# Altium PCB 红黑红黑的小黄鸡二队区赛2.0.PcbDoc
Units mil, origin at the board's own origin, x right, y up, seen from the top; angles counter-clockwise.
Board outline 4400.1 x 3055.69 mil, 2 copper layers (Top Layer, Bottom Layer); 73 components, 67 nets, 341 pads, 184 vias.
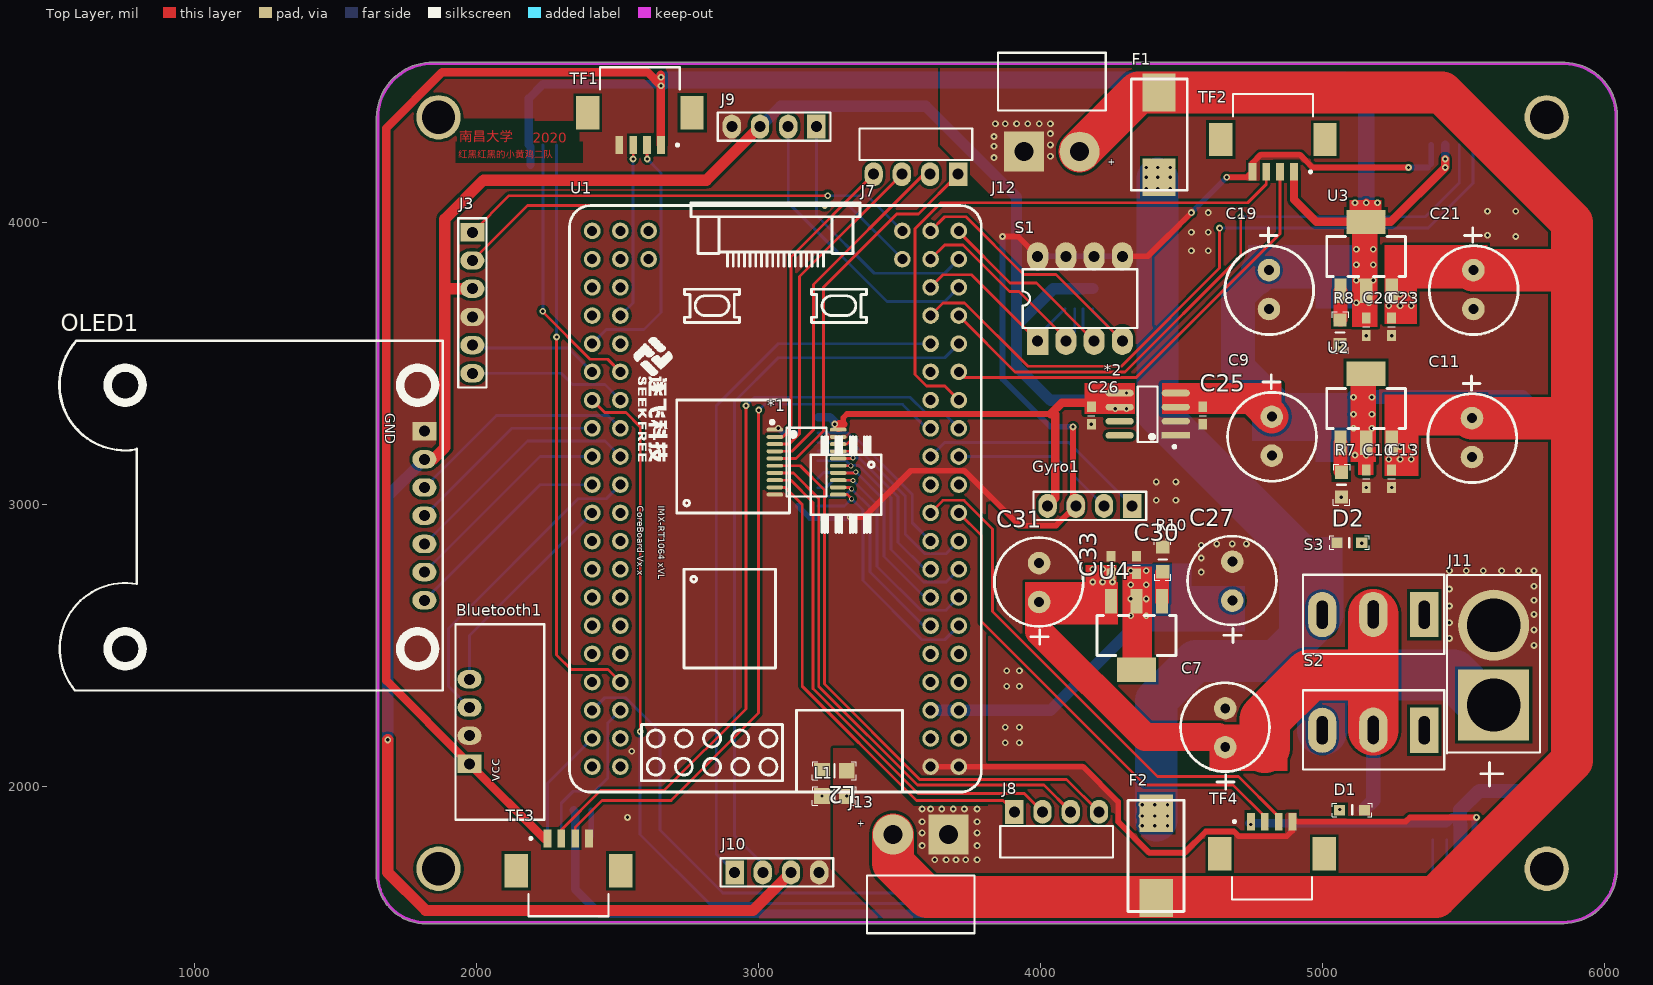
[diagram p0: Top Layer view]
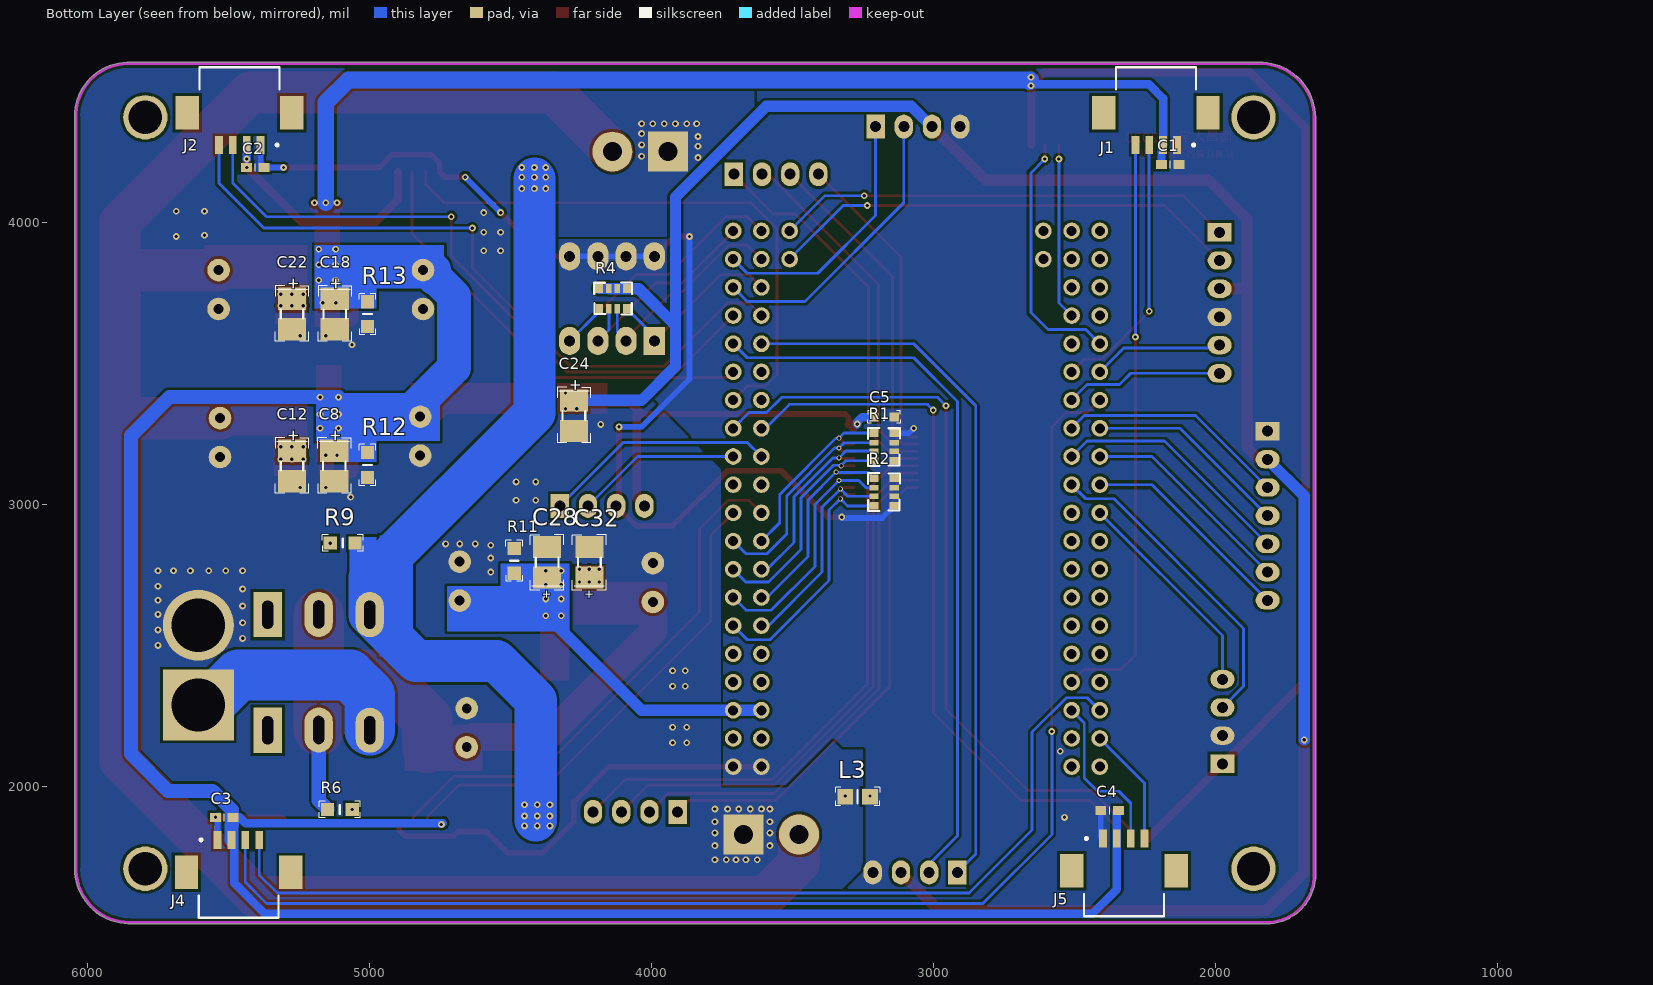
[diagram p1: Bottom Layer view, seen from below]
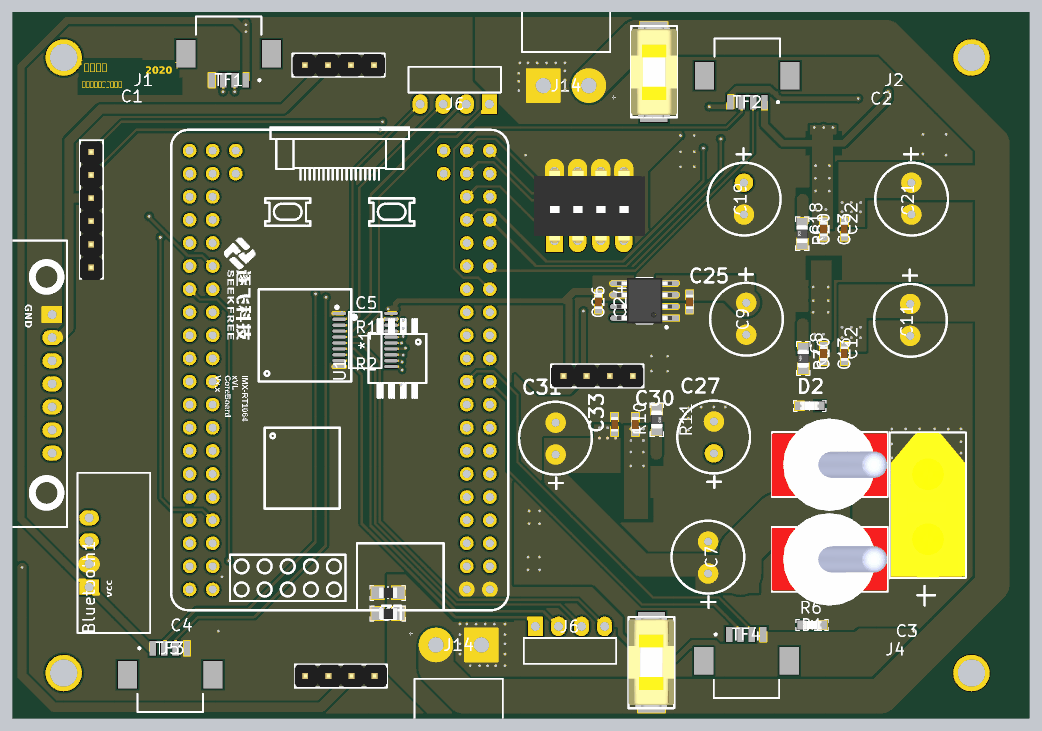
[diagram p2: 3D render of the assembled board from above, using the file's embedded part models]
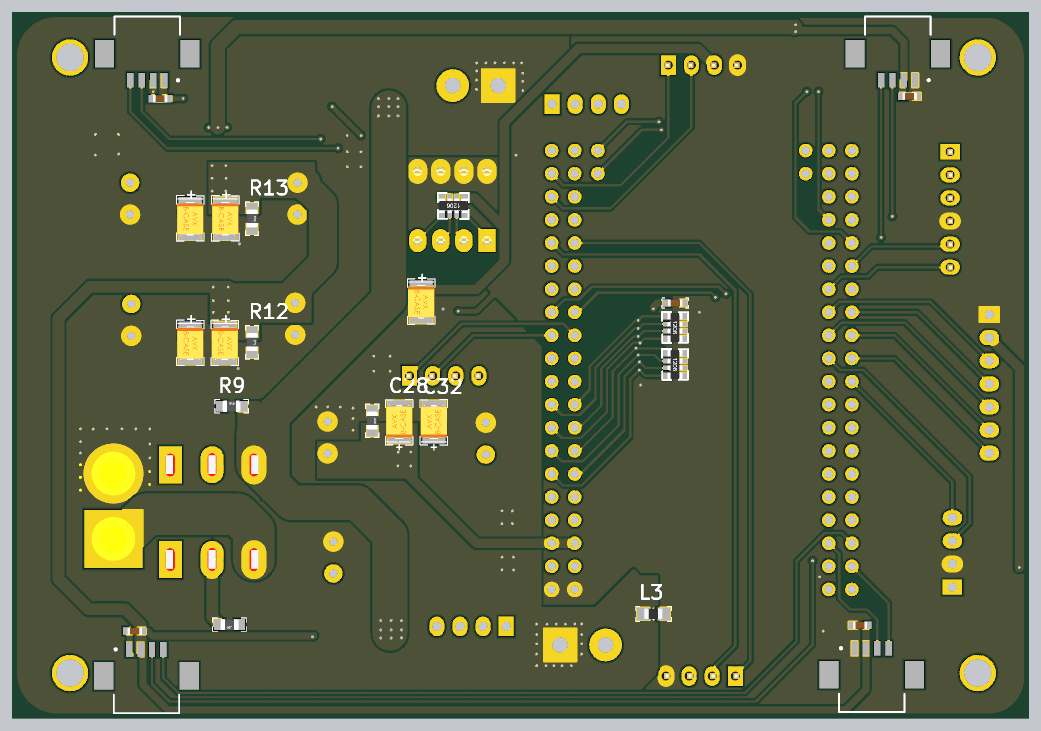
[diagram p3: 3D render of the assembled board from below, using the file's embedded part models]

## Layer stack, top to bottom
Top Solder: solder mask 0.4, Solder Resist, Dk 3.5
Top Layer: signal copper 1.4
Dielectric 1: dielectric 12.6, FR-4, Dk 4.8
Bottom Layer: signal copper 1.4
Bottom Solder: solder mask 0.4, Solder Resist, Dk 3.5

## Board outline
1645,1672.56 ccw(c1820,1688) 1835.22,1512.98 5850,1512.98 ccw(c5850,1518) 5852.5,1513.65 ccw(c5855,1518) 5855.13,1512.99 ccw(c5850,1708) 6045.08,1708 ccw(c5850,1708) 6045.02,1713.07 ccw(c5850,1708) 6045.01,1713.13 6045.02,1713 6045.02,4372.93 ccw(c5855,4378) 6045.08,4378 ccw(c5855,4378) 5860.14,4568.01 ccw(c5860,4563) 5860,4568.01 5860,4568.02 1845.03,4568.02 cw(c1842.5,4370.5) 1845.07,4568.01 1845.03,4568.02 ccw(c1842.5,4370.5) 1644.99,4373.07 ccw(c1650,4373) 1644.98,4373 1644.98,1673 ccw(c1650,1673)

## Design rules (kind name [scope] priority, off if disabled: settings)
Clearance [All] p1: gap=10
PlaneConnect [All] p1: planeconnectstyle=Direct reliefexpansion=20 reliefentries=4 reliefconductorwidth=10 reliefairgap=10
PolygonConnect [All] p1: connectstyle=Direct reliefconductorwidth=10 reliefentries=4 polygonreliefangle="90 Angle" airgapwidth=10
RoutingVias [All] p1: holewidth=28 width=50 viastyle="Through Hole" minholewidth=28 minwidth=50 maxholewidth=28 maxwidth=50
SolderMaskExpansion [All] p1: expansion=4
UnpouredPolygon [All] p1: allowunpoured=FALSE
Width [All] p1: maxlimit=200 minlimit=10 preferedwidth=10
28 further rules are at their usual default settings.

## Components (designator, comment, footprint, x,y, rotation, side; value= is the part's Value field where it differs from the comment)
*1 "74LV245a" TSSOP-20 3170,3150 r270 top
*2 "TPS76833" SOIC_8 4380,3320 r0 top
Bluetooth1 "Bluetooth4-pin" Bluetooth-4 1975,2080 r90 top
C1 "0603" CAP-0603#1 2160,4205 r180 bottom
C2 "0603" CAP-0603#1 5405,4195 r180 bottom
C3 "0603" CAP-0603#1 5515,1890 r0 bottom
C4 "0603" CAP-0603#1 2375,1915 r0 bottom
C5 "CAP-0603(1608)" CAP-0603#2 3175,3310 r0 bottom
C7 "CAP-DIP-8*14" CAP-DIP-8X14 4670,2210 r90 top
C8 "" CAP-3528 5125,3136.02 r270 bottom
C9 "" CAP-DIP-8X14 4805,3240 r270 top
C10 "" CAP-0603#1 5155,3091.02 r90 top
C11 "" CAP-DIP-8X14 5515,3235 r270 top
C12 "" CAP-3528 5275,3136.02 r270 bottom
C13 "" CAP-0603#1 5245,3091.02 r90 top
C18 "" CAP-3528 5123,3675 r270 bottom
C19 "" CAP-DIP-8X14 4795,3760 r270 top
C20 "" CAP-0603#1 5155,3630 r90 top
C21 "" CAP-DIP-8X14 5520,3760 r270 top
C22 "" CAP-3528 5275,3675 r270 bottom
C23 "" CAP-0603#1 5245,3630 r90 top
C24 "CAP-TAN-3528(B)" CAP-3528 4275,3315 r270 bottom
C25 "CAP-0603(1608)" CAP-0603#1 4575,3315 r90 top
C26 "CAP-0603(1608)" CAP-0603#1 4180,3315 r270 top
C27 "" CAP-DIP-8X14 4695,2730 r90 top
C28 "" CAP-3528 4370,2795 r90 bottom
C30 "" CAP-0603#1 4340,2785 r270 top
C31 "" CAP-DIP-8X14 4010,2725 r90 top
C32 "" CAP-3528 4220,2795 r90 bottom
C33 "" CAP-0603#1 4250,2785 r270 top
D1 "LED-0805" LED-0805 5105,1916 r0 top
D2 "LED-0805" LED-0805 5095,2865 r180 top
F1 "FUSE-1808-Base" Fuse1808_Base 4420,4160 r90 top
F2 "FUSE-1808-Base" Fuse1808_Base 4410,1905 r270 top
Gyro1 "Header1x4" HEADER1X4 4175,2990 r180 top
J1 "XH-1.25-4P" XH-1.25-4 2210,4275 r0 bottom locked
J2 "XH-1.25-4P" XH-1.25-4 5460,4275 r0 bottom
J3 "Header1x6" HEADER1X6 1985,3715 r270 top
J4 "XH-1.25-4P" XH-1.25-4 5465,1810 r180 bottom
J5 "XH-1.25-4P" XH-1.25-4 2325,1815 r180 bottom
J7 "Header1x4弯座" "HEADER1X4 - BENT" 3560,4172 r180 top locked (schematic designator J6)
J8 "Header1x4弯座" "HEADER1X4 - BENT" 4055,1909 r0 top locked (schematic designator J6)
J9 "Header1x4" HEADER1X4 3055,4335 r180 top
J10 "Header1x4" HEADER1X4 3065,1700 r0 top
J11 "Header-XT60-FEMALE" HEADER-XT60-FEMALE 5610,2290 r90 top
J12 "XT30-F" XT30PW-F 4040,4251.35 r0 top locked (schematic designator J14)
J13 "XT30-F" XT30PW-F 3575,1829.65 r180 top locked (schematic designator J14)
L1 "磁珠0805" bead-0805 3270,1965 r180 top
L2 "磁珠0805" bead-0805 3270,2055 r180 top
L3 "磁珠0805" bead-0805 3270,1965 r180 bottom
OLED1 "OLED" OLED 1815,3260 r270 top
R1 "RES-0603-PACK" "RES-0603 - PACK" 3175,3205 r180 bottom
R2 "RES-0603-PACK" "RES-0603 - PACK" 3175,3045 r180 bottom
R4 "RES-0603-PACK" "RES-0603 - PACK" 4135,3730 r270 bottom
R6 "RES-0805" RES-0805 5100,1991 r0 bottom
R7 "" RES-0805 5140,3065 r90 top
R8 "" RES-0805 5135,3605 r90 top
R9 "RES-0805" RES-0805 5100,2790 r180 bottom
R10 "" RES-0805 4360,2810 r270 top
R11 "RES-0805" RES-0805 4560,2805 r270 bottom
R12 "RES-0805" RES-0805 5080,3145 r270 bottom
R13 "RES-0805" RES-0805 5080,3680 r270 bottom
S1 "SW-4" DIP-8 4155,3735 r90 top
S2 "SW" SW-B 5180,2200 r180 top
S3 "SW-B" SW-B 5180,2610 r180 top
TF1 "XH-1.25-4P" XH-1.25-4 2580,4275 r180 top
TF2 "XH-1.25-4P" XH-1.25-4 4825,4180 r180 top
TF3 "XH-1.25-4P" XH-1.25-4 2325,1815 r0 top
TF4 "XH-1.25-4P" XH-1.25-4 4820,1875 r0 top
U1 "MIMXRT1064xVL_CoreBoard" MIMXRT1064xVL_CoreBoard 3060,3020 r90 top locked
U2 "LT3080EST#TRPBF" SOT-223-3_L6.5-W3.4-P2.30-LS7.0-BR 53510,-44993.98 r270 top
U3 "LT3080EST#TRPBF" SOT-223-3_L6.5-W3.4-P2.30-LS7.0-BR 53510,-44455 r270 top
U4 "LT3080EST#TRPBF" SOT-223-3_L6.5-W3.4-P2.30-LS7.0-BR -44015,50870 r90 top

## Footprints (in the part's own frame and the unit in brackets; to place one, negate y for a bottom-side part, rotate by r counter-clockwise, add the part's x,y. Pads: shape width x height; smd on the part's side, far side on the other; paste and mask are expansions set on the pad)
bead-0805 [mil]
  rect 55.12x55.12 smd: 1(-43,-1) 2(45,-1)
  silkscreen extent -76,-33 79,32, body extent -39,-24 39,23, height 37
Bluetooth-4 [mil]
  rect 65x85 hole 39: 1(0,0)
  oval 65x85 hole 39: 2(100,0) 3(200,0) 4(300,0)
  silkscreen extent -198,-265 495,50, body extent -61,-49 359,49, height 344
CAP-0603#1 [mm]
  rect 0.96x0.8 smd: 1(-0.79,0) 2(0.79,0)
  silkscreen extent 0,-0.33 0,0.33, body extent -0.8,-0.41 0.8,0.41, height 0.8
CAP-0603#2 [mm]
  rect 0.826x0.8 smd: 1(-0.914,0) 2(0.914,0)
  silkscreen extent -1.47,-0.56 1.47,0.56, body extent -1.05,-0.39 1.05,0.41, height 0.8
CAP-3528 [mm]
  rect 2x2.54 smd: 1(-1.374,0) 2(1.374,0)
  silkscreen extent -2.54,-1.5 2.47,1.52, body extent -1.85,-1.47 1.85,1.46, height 2.03
CAP-DIP-8X14 [mil]
  round 80 hole 35.43: 1(-71,15) 2(67,15)
  silkscreen extent -220,-141 157,173, body extent -162,-144 160,178, height 567
DIP-8 [mil]
  rect 100x75 hole 39: 1(-155,165)
  oval 100x75 hole 39: 2(-155,65) 3(-155,-35) 4(-155,-135) 5(145,-135) 6(145,-35) 7(145,65) 8(145,165)
  silkscreen extent -109,-188 99,218, body extent -166,-226 158,254, height 204
Fuse1808_Base [mm]
  rect 3.4x3 smd: 1(0,0) 2(7.645,0)
  silkscreen extent -1.17,-2.54 8.86,2.5, body extent -1.1,-2.54 8.72,2.49, height 3.81
HEADER1X4 [mil]
  rect 65x85 hole 39: 1(-150,-5)
  oval 65x85 hole 39: 2(-50,-5) 3(50,-5) 4(150,-5)
  silkscreen extent -200,-55 200,45, body extent -200,-53 200,45, height 323
"HEADER1X4 - BENT" [mil]
  rect 65x85 hole 39: 1(-148,1)
  oval 65x85 hole 39: 2(-48,1) 3(52,1) 4(152,1)
  silkscreen extent -198,-161 202,-49, body extent -199,-394 201,14, height 121
HEADER1X6 [mil]
  rect 65x85 hole 39: 1(-250,0)
  oval 65x85 hole 39: 2(-150,0) 3(-50,0) 4(50,0) 5(150,0) 6(250,0)
  silkscreen extent -300,-50 300,50, body extent -295,-50 305,48, height 323
HEADER-XT60-FEMALE [mm]
  rect 6.4x6.4 hole 4.8: 1(-0.025,0.076)
  round 6.4 hole 4.8: 2(7.163,0.076)
  silkscreen extent -7.34,-4.09 11.68,4.29, body extent -4.27,-4 11.63,4.15, height 18
LED-0805 [mil]
  rect 39.24x37.24 smd: 1(-44.11,0) 2(44.11,0)
  silkscreen extent -70,-24 70,24, body extent -40,-18 42,18, height 33
MIMXRT1064xVL_CoreBoard [mm] "逐飞科技i.MX RT1064核心板整体封装，可?"
  round 1.5 hole 0.9: 1(-24.13,-16.51) 2(-24.13,-13.97) 3(-21.59,-16.51) 4(-21.59,-13.97) 5(-19.05,-16.51) 6(-19.05,-13.97) 7(-16.51,-16.51) 8(-16.51,-13.97) 9(-13.97,-16.51) 10(-13.97,-13.97) 11(-11.43,-16.51) 12(-11.43,-13.97) 13(-8.89,-16.51) 14(-8.89,-13.97) 15(-6.35,-16.51) 16(-6.35,-13.97) 17(-3.81,-16.51) 18(-3.81,-13.97) 19(-1.27,-16.51) 20(-1.27,-13.97) 21(1.27,-16.51) 22(1.27,-13.97) 23(3.81,-16.51) 24(3.81,-13.97) 25(6.35,-16.51) 26(6.35,-13.97) 27(8.89,-16.51) 28(8.89,-13.97) 29(11.43,-16.51) 30(11.43,-13.97) 31(13.97,-16.51) 32(13.97,-13.97) 33(16.51,-16.51) 34(16.51,-13.97) 35(19.05,-16.51) 36(19.05,-13.97) 37(21.59,-16.51) 38(21.59,-13.97) 39(24.13,-16.51) 40(24.13,-13.97) 41(21.59,-11.43) 42(24.13,-11.43) 43(24.13,11.43) 44(21.59,11.43) 45(24.13,13.97) 46(24.13,16.51) 47(21.59,13.97) 48(21.59,16.51) 49(19.05,13.97) 50(19.05,16.51) 51(16.51,13.97) 52(16.51,16.51) 53(13.97,13.97) 54(13.97,16.51) 55(11.43,13.97) 56(11.43,16.51) 57(8.89,13.97) 58(8.89,16.51) 59(6.35,13.97) 60(6.35,16.51) 61(3.81,13.97) 62(3.81,16.51) 63(1.27,13.97) 64(1.27,16.51) 65(-1.27,13.97) 66(-1.27,16.51) 67(-3.81,13.97) 68(-3.81,16.51) 69(-6.35,13.97) 70(-6.35,16.51) 71(-8.89,13.97) 72(-8.89,16.51) 73(-11.43,13.97) 74(-11.43,16.51) 75(-13.97,13.97) 76(-13.97,16.51) 77(-16.51,13.97) 78(-16.51,16.51) 79(-19.05,13.97) 80(-19.05,16.51) 81(-21.59,13.97) 82(-21.59,16.51) 83(-24.13,13.97) 84(-24.13,16.51)
  silkscreen extent -26.42,-18.54 26.67,18.54
OLED [mil]
  rect 65x85 hole 39: 1(0,0)
  oval 65x85 hole 39: 2(100,0) 3(200,0) 4(300,0) 5(400,0) 6(500,0) 7(600,0)
  silkscreen extent -320,-1295 920,65, body extent -60,-50 660,48, height 344
"RES-0603 - PACK" [mil]
  rect 32.5x27.56 smd: 1(-36,48) 4(-36,-50) 5(36.01,-50) 8(36,48)
  rect 32.5x19.68 smd: 2(-36,14) 3(-36,-16) 6(36.01,-16) 7(36.01,14)
  silkscreen extent -57,-68 56,66, body extent -41,-64 41,62
RES-0805 [mil]
  rect 46.85x47.24 smd: 1(-39,73) 2(49,73)
  silkscreen extent -68,44 78,102, body extent -35,48 43,98, height 31
SOIC_8 [mm]
  rect 2.54x0.6 smd: 1(2.527,-1.905)
  oval 2.54x0.6 smd: 2(2.527,-0.635) 3(2.527,0.635) 4(2.527,1.905) 5(-2.527,1.905) 6(-2.527,0.635) 7(-2.527,-0.635) 8(-2.527,-1.905)
  silkscreen extent -0.89,-3.05 2.54,2.5, body extent -3.02,-2.51 3.02,2.51, height 1.6
SOT-223-3_L6.5-W3.4-P2.30-LS7.0-BR [mm]
  rect 2.2x1.1 smd: 1(-1224.602,-1230.523) 2(-1224.602,-1228.223) 3(-1224.602,-1225.923)
  rect 2.2x3.5 smd: 4(-1230.8,-1228.223)
  silkscreen extent -1229.5,-1231.77 -1225.9,-1224.67
SW-B [mil]
  rect 100x160 hole 40 slot 100 at 90 deg: 1(-181,1)
  oval 100x160 hole 40 slot 100 at 90 deg: 2(0,0) 3(181,1)
  silkscreen extent -252,-141 249,140, body extent -251,-200 250,200, height 1120
TSSOP-20 [mm]
  oval 0.35x1.5 smd: 1(-2.925,-2.85) 2(-2.275,-2.85) 3(-1.625,-2.85) 4(-0.975,-2.85) 5(-0.325,-2.85) 6(0.325,-2.85) 7(0.975,-2.85) 8(1.625,-2.85) 9(2.275,-2.85) 10(2.925,-2.85) 11(2.925,2.85) 12(2.275,2.85) 13(1.625,2.85) 14(0.975,2.85) 15(0.325,2.85) 16(-0.325,2.85) 17(-0.975,2.85) 18(-1.625,2.85) 19(-2.275,2.85) 20(-2.925,2.85)
  silkscreen extent -3.75,-3.25 3.1,1.8
XH-1.25-4 [mm]
  rect 2.1x3 smd: 0(-4.675,-2.9) 0(4.725,-2.9)
  rect 0.7x1.6 smd: 1(-1.875,0) 2(-0.625,0) 3(0.625,0) 4(1.875,0)
  silkscreen extent -3.57,-7 3.63,0.11
XT30PW-F [mm]
  rect 3.6x3.6 hole 1.7: 1(-2.5,0)
  round 3.6 hole 1.7: 2(2.5,0)
  silkscreen extent -4.85,3.71 4.85,8.9

## Part data
*2: library part TPS768xx
C1 C2 C3 C4 C10 C13 C20 C23 C30 C33: library part CAP-0603(1608)
C7: "100UF"
C8 C12 C18 C22 C28 C32: library part CAP-TAN-3528(B), "0.15~150UF"
C9 C11 C19 C21 C27 C31: library part CAP-DIP-8*14, "100UF"
C24: "0.15~150UF"
F1 F2: "保险丝"
J7 J8: library part Header1x4
J11: "航模接头"
J12 J13: "Ir=15A, Imax=30A, Vr=500V, Rc=0.8mΩ, -20°C-120°C, 1000Times"
L1 L2 L3: library part 磁珠
R7 R8 R10: library part RES-0805
U1: "逐飞科技i.MX RT1064核心板整体原理，可直接使用"

## Free pads (board coordinates)
  round 157.48 hole 118.11: 0(1865,1708) 0(1865,4373) 0(5795,1708) 0(5795,4373)

## Via types
v1: diameter 24, hole 12, Top Layer to Bottom Layer, tented both sides, 176 vias
v2: diameter 18, hole 12, Top Layer to Bottom Layer, tented both sides, 8 vias

## Nets (pads, with @x,y where several pads share a name; then routed paths per layer and width w, separated by ;. In a path a pad name is that pad's centre, name@x,y a point inside that pad or via, vN(x,y) a via of type N, cw(c..) or ccw(c..) an arc to the next point about the centre after c; other vN are vias at no path point)
3V3: *1.20 *2.5 *2.6 C5.2 C24.1 C26.1 Gyro1.4 J3.3 J9.3 J10.3 OLED1.2 R4.1 R4.2 R4.3 R4.4 | length 9153.8
  Top Layer w20: 3300,3285 3300,3307 3313.47,3320.47 4035.47,3320.47 4052.03,3320.47 4052.5,3320
  Top Layer w30: *1.20@3282.2,3271.46 *1.20@3286.46,3271.46 ; 3286.46,3285 3300,3285 ; Gyro1.4 4052.5,3022.5 4052.5,3320 ; 4035.47,3320.47 4075,3360 4245,3360
  Top Layer w40: v1(1685,2165) 1685,2135 1685,1695 1820,1560 2980,1560 J10.3 ; OLED1.2 1845,3160 1887.5,3202.5 1887.5,3765 ; J3.3 1887.5,3765 ; J9.3 2815,4150 2025,4150 1887.5,4012.5 1887.5,3765
  Bottom Layer w30: C5.2 3253,3310 3270,3293 v1(3270,3285)
  Bottom Layer w40: v1(1685,2165) 1685,3030 OLED1.2 ; J9.3 3006.61,4340 3079.11,4412.5 3592.5,4412.5 3915,4090 3915,3634.93 ; R4.4 R4.3 4150,3765 4045.07,3765 3915,3634.93 ; C24.1 4035.92,3369.08 3915,3490 3915,3634.93
  other v1: 4265,3340 4305,3340 4305,3395
5V: *2.3 *2.4 Bluetooth1.1 C1.1 C2.1 C3.1 C4.1 C8.1 C9.1 C10.2 C18.1 C19.1 C20.2 C25.2 J1.2 J2.2 J4.2 J5.2 R12.1 R13.1 TF1.1 TF2.1 TF3.1 TF4.1 U2.2 U2.4 U3.2 U3.4 | length 16241.8
  Top Layer w30: TF3.1@2240,1815 Bluetooth1.1 1680,2375 1680,4334.71 1878.29,4533 2605.82,4533 v1(2653.82,4485) ; TF1.1 v1(2653.82,4485) ; v1@2653.82,4523.82 v1(2653.82,4515) v1(2653.82,4485) ; TF2.1 4898.82,4081.18 4978.31,4001.69 U3.4 ; v1@5154.53,4070 5154.76,4069.76 U3.4 ; v1(5435,4225) v1(5435,4195) 5241.69,4001.69 U3.4
  Top Layer w120: 4761,3370 C9.1
  Bottom Layer w30: J1.2 2185.39,4440 2235.39,4490 v1@2648.82,4490 ; C1.1 J1.2@2191.1,4269.29 ; C4.1 2349.61,1909.29 J5.2 ; 2349.61,1760.51 J5.2 ; v1@4740,1870 4740.62,1869.38 5439.38,1869.38 5460,1890 C3.1 ; v1@5435.39,4225 J2.2 ; J4.2 5479.17,1799.57 5479.17,1656.75 5370.43,1548 2437,1548 2349.61,1635.39 J5.2
  Bottom Layer w50: v1(5110,3380) 5111,3381 5709,3381 5845,3245 5845,2115 5714.02,1984.02 5555.98,1984.02 5488,1916.04 5488,1865.53 5489.61,1863.93 J4.2
  Bottom Layer w60: 2660,4500 2655,4505 5075,4505 5155,4425 v1(5155,4070)
  Bottom Layer w120: C19.1 4771,3831 4771,3803 4764.44,3803 4700,3738.56 4700,3485 4865,3320
  other v1: 4745,1865 5115,3175 5155,3175 5110,3270 5175,3270 5110,3320 5175,3320 5175,3380 5120,3715 5165,3715 5120,3795 5180,3795 5120,3850 5180,3850 5120,3905 5180,3905 5115,4070 5195,4070
5V-MCU: C27.1 C28.1 C30.2 R11.2 U1.5 U1.6 U4.2 U4.4 | length 856.3
  Bottom Layer w40: U1.6 U1.5 4035,2270 4340,2575
  other v1: 4320,2605 4375,2605 4320,2665 4375,2665 4320,2715 4375,2715 4320,2765 4375,2765
7V2-LATER: C11.1 C12.1 C13.2 C21.1 C22.1 C23.2 F1.2 F2.2 J12.2 J13.2 U2.3 U3.3 | length 7421.6
  Top Layer w150: J13.2 3476.57,1728.43 3597,1608 5401.28,1608 5885,2091.72 5885,3335 ; J12.2 4348.07,4461 F1.2 5424,4461 5885,4000 5885,3335 ; C11.1 5856,3306 5885,3335 ; C21.1 5856,3831 5885,3860
  other v1: 5235,3160 5275,3160 5315,3160 5235,3205 5275,3205 5315,3205 5235,3705 5275,3705 5315,3705 5235,3745 5275,3745 5315,3745
7V2-MCU: C7.1 C31.1 C32.1 C33.2 R6.2 S2.2 S3.2 U4.3 | length 2148.3
  Top Layer w100: C31.1 3995,2550 4370,2175 4630,2175
  Top Layer w180: 4795,2137 4795,2237.13 4952.87,2395 5180,2395 ; S2.2 5180,2395 ; S3.2 5180,2395
  Bottom Layer w50: R6.2@5149,1919.38 5180,1950.38 S2.2
  other v1: 4185,2725 4220,2725 4255,2725 4185,2770 4220,2770 4255,2770
AGND: *2.1 *2.2 C7.2 C8.2 C9.2 C10.1 C11.2 C12.2 C13.1 C18.2 C19.2 C20.1 C21.2 C22.2 C23.1 C24.2 C25.1 C26.2 C27.2 C28.2 C30.1 C31.2 C32.2 C33.1 D1.2 D2.2 J11.2 J12.1 J13.1 L1.1 L2.1 L3.1 R7.1 R8.1 R10.1 R11.1 R12.2 R13.2 | length 19.5
  Top Layer w120: J13.1 J13.1@3673.43,1832.01
  Bottom Layer w80: J12.1@3929.43,4263.5 J12.1
  other v1: 3625,1740 3665,1740 3700,1740 3735,1740 3775,1740 3580,1790 3775,1790 3580,1835 3775,1835 3580,1875 3775,1875 3580,1920 3610,1920 3650,1920 3690,1920 3730,1920 3775,1920 3313,1966 3875,2155 3925,2155 3875,2210 3925,2210 3880,2355 3925,2355 3880,2410 3925,2410 5750,2500 5450,2525 5750,2555 5450,2580 5750,2610 5450,2640 5750,2660 5450,2700 5750,2710 4570,2760 5450,2765 5510,2765 5570,2765 5635,2765 5695,2765 5750,2765 4570,2810 4570,2855 4625,2860 4680,2860 4730,2860 4410,3015 4480,3015 5067,3026 5155,3059.92 5245,3059.92 4410,3080 4480,3080 4180,3283.9 5062,3566 5155,3598.9 5245,3598.9 4535,3900 4595,3900 5685,3950 5585,3955 4535,3965 4595,3965 4595,4035 5585,4040 5685,4040 3835,4230 4035,4235 3835,4270 4035,4275 3835,4305 4035,4315 3840,4350 3875,4350 3915,4350 3955,4350 3995,4350 4035,4350
BAT-7V2: J11.1 S2.3 | length 806.3
  Bottom Layer w180: S2.3 4999,2324 5070,2395 5464.41,2395 5570.41,2289 J11.1
BT_RX: Bluetooth1.4 U1.66 | length 790.2
  Bottom Layer w10: Bluetooth1.4 1975,2535 U1.66 U1.66@2390,2970
BT_TX: Bluetooth1.3 U1.63 | length 1132.3
  Bottom Layer w10: Bluetooth1.3 1900,2355 1900,2560 2360,3020 2460,3020 U1.63
CS: OLED1.7 U1.64 | length 764.8
  Bottom Layer w10: OLED1.7 2225,3070 U1.64
D0: OLED1.3 U1.59 | length 819.3
  Bottom Layer w10: OLED1.3 2070,3315 2465,3315 U1.59
D1: OLED1.4 U1.60 | length 723.4
  Bottom Layer w10: OLED1.4 2125,3270 U1.60
DC: OLED1.6 U1.62 | length 764.8
  Bottom Layer w10: OLED1.6 2225,3170 U1.62
DGND: *1.1 *1.10 *1.19 Bluetooth1.2 C1.2 C2.2 C3.2 C4.2 C5.1 Gyro1.3 J1.1 J2.1 J3.4 J4.1 J5.1 J9.4 J10.4 L1.2 L2.2 L3.2 OLED1.1 R1.5 R1.6 R1.7 R1.8 R2.5 R2.6 R2.7 R2.8 S1.5 S1.6 S1.7 S1.8 TF1.4 TF2.4 TF3.4 TF4.4 U1.1 U1.2 | length 6531.9
  Top Layer w20: v1(3325,2955) 3375,2955 3539.53,3119.53 3730.51,3119.53 3925.04,2925 4055,2925 Gyro1.3 4115,3005 v1(4115,3275) ; U1.2 U1.1 4150,2070 4275,1945 4275,1875 4385,1765 4511.44,1765 4586.32,1839.88 4685.57,1839.88 4701.95,1823.5 4873.5,1823.5 4893.82,1843.82 TF4.4 5295,1875 5310,1890 v1(5546.1,1890) ; v1(3865,3950) 3920,3950 S1.8 ; S1.5 4380,3880 v1(4535,4035) ; v1(4660,4160) 4731.18,4160 TF2.4 4751.18,4211.18 4780,4240 4920,4240 4965,4195 v1(5305,4195)
  Bottom Layer w20: J5.1 2406.1,1822.28 C4.2 ; v1(3070,3270) 3087,3253 R1.8 ; R2.5 3182,2952 v1@3322,2952 ; v1@3322,2955 v1(3325,2955) ; v1(3865,3950) 3865,3445 4035,3275 v1(4115,3275) ; S1.8 S1.6 S1.5 ; v1(4535,4035) v1(4660,4160) ; v1(5305,4195) C2.2 ; C2.2@5386.18,4207.28 J2.1 ; J4.1 5538.82,1882.72 v1(5546.1,1890)
  other v1: 2535,1890 3225,1966 2550,2125
DIR1: J1.3 U1.55 | length 956
  Top Layer w10: v1(2235,3685) 2235,3682.03 2402.03,3515 2465,3515 U1.55
  Bottom Layer w10: J1.3 2235,4274.61 v1(2235,3685)
DIR2: J2.3 U1.33 | length 2352.2
  Top Layer w10: U1.33 3910,3470 4300,3470 4710,3880 v1(4710,4020)
  Bottom Layer w10: v1(4710,4020) 5365,4020 5484.61,4139.61 J2.3
DIR3: J4.3 U1.58 | length 4803.2
  Top Layer w10: U1.58 2454.53,3325.47 2529.53,3325.47 2580.39,3274.61 v1(2580.39,2194.61)
  Bottom Layer w10: v1@2580,2200 2580,1830 2825,1585 5365,1585 5440.39,1660.39 J4.3 J4.3@5440,1809.61
DIR4: J5.3 U1.79 | length 585.8
  Bottom Layer w10: J5.3 2300.39,1940.39 2342.93,1982.93 2417.93,1982.93 2465,2030 2465,2225 U1.79
FM1_SCL: J3.5 U1.56 | length 464.4
  Bottom Layer w10: J3.5 1995,3555 2325,3555 U1.56
FM1_SDA: J3.6 U1.57 | length 564.4
  Bottom Layer w10: J3.6 2300,3465 2340,3425 2455,3425 U1.57
FUSE: F1.1 F2.1 R9.2 S3.3 | length 2927.8
  Bottom Layer w150: 4410,1880 4410,2305 4550,2445 4835,2445 S3.3 4999,2741 4415,3325 v1@4415,4155
  other v1: 4360,1860 4405,1860 4450,1860 4360,1895 4405,1895 4450,1895 4360,1935 4405,1935 4450,1935 4375,4120 4415,4120 4460,4120 4375,4160 4415,4160 4460,4160 4375,4195 4415,4195 4460,4195
LO: J3.1 U1.42 | length 1630.6
  Top Layer w10: J3.1 2115,4095 v1(3245,4095)
  Bottom Layer w10: v1(3245,4095) 3385,4095 U1.42
LSB1: J1.4 U1.77 | length 2074.8
  Top Layer w10: v1(2283.82,3593.82) 2283.82,2466.18 2335.47,2414.53 2465.47,2414.53 U1.77
  Bottom Layer w10: v1(2283.82,3593.82) J1.4
LSB2: J2.4 U1.34 | length 2523.2
  Top Layer w10: U1.34 3654.53,3714.53 3730.47,3714.53 3955,3490 4286.75,3490 4635,3838.25 v1(4635,3980)
  Bottom Layer w10: v1(4635,3980) 5375,3980 5533.82,4138.82 J2.4
LSB3: J4.4 U1.80 | length 3640.8
  Bottom Layer w10: U1.80 2454.53,2314.53 2528.44,2314.53 2650,2192.97 2650,1845 2873.23,1621.77 5326.53,1621.77 5391.18,1686.42 J4.4
LSB4: J5.4 U1.82 | length 420.8
  Bottom Layer w10: J5.4 2251.18,2011.18 U1.82
M1: J9.2 U1.35 | length 1040.7
  Bottom Layer w10: J9.2 3105,4070 3455,3720 3660,3720 U1.35
M2: J9.1 U1.37 | length 932.7
  Bottom Layer w10: J9.1@3210,4335 J9.1 3205,4025 3410,3820 3660,3820 U1.37
M3: J10.2 U1.31 | length 2591.3
  Bottom Layer w10: J10.2 3015,1725 2915,1825 2915,3365 3070,3520 3660,3520 U1.31
M4: J10.1 U1.32 | length 2533.1
  Bottom Layer w10: J10.1 2850,1760 2850,3350 3070,3570 U1.32
MPU_SCL: Gyro1.2 U1.23 | length 587.5
  Bottom Layer w10: U1.23 4050,3170 Gyro1.2
MPU_SDA: Gyro1.1 U1.24 | length 828.9
  Bottom Layer w10: U1.24 3660,3220 4100,3220 Gyro1.1
NetD1_1: D1.1 R6.1
  other v1: 5061,1918
NetD2_1: D2.1 R9.1
  other v1: 5139,2863
NetR7_2: R7.2 U2.1 | length 101.9
  Top Layer w50: R7.2@5064.21,3116.79 U2.1
NetR8_2: R8.2 U3.1 | length 101.5
  Top Layer w50: R8.2@5064.21,3656.21 U3.1
NetR10_2: R10.2 U4.1 | length 101.5
  Top Layer w50: U4.1 R10.2@4430.79,2758.79
OUT1: *1.2 J7.4 | length 1092.9
  Top Layer w10: *1.2 3085.8,3239.57 3102.32,3256.09 3102.32,3267.32 3115,3280 3115,3878 J7.4
OUT2: *1.3 J7.3 | length 1173.5
  Top Layer w10: *1.3 3108.98,3213.98 3145,3250 3145,3808 J7.3
OUT3: *1.4 J7.2 | length 1258.9
  Top Layer w10: *1.4 3118.39,3188.39 3195,3265 3195,3780 3586,4171 J7.2
OUT4: *1.5 J7.1 | length 1366.6
  Top Layer w10: *1.5 3132.8,3162.8 3230,3260 3230,3770 3490,4030 3567,4030 J7.1
OUT5: *1.6 J8.4 | length 2060.8
  Top Layer w10: *1.6 3147.8,3137.2 3233.36,3051.64 3233.36,2363.21 3571.57,2025 4092,2025 J8.4
OUT6: *1.7 J8.3 | length 1937.5
  Top Layer w10: *1.7 3123.39,3111.61 3213.36,3021.64 3213.36,2354.93 3563.28,2005 4012,2005 J8.3
OUT7: *1.8 J8.2 | length 1822.9
  Top Layer w10: *1.8 3113.98,3086.02 3193.36,3006.64 3193.36,2346.64 3565,1975 3942,1975 J8.2
OUT8: *1.9 J8.1 | length 1703.6
  Top Layer w10: *1.9 3094.57,3060.43 3155,3000 3155,2355 3560,1950 3867,1950 J8.1
PWM1: *1.14 R2.1 U1.14 | length 773.8
  Top Layer w10: *1.14 3341.61,3111.61 v2(3345,3115)
  Bottom Layer w10: R2.1 3231,3113 3343,3113 v2(3345,3115) 3445,3015 3445,2815 3590,2670 U1.14
PWM2: *1.13 R2.2 U1.13 | length 899.6
  Top Layer w10: *1.13 v2@3333.98,3086.02
  Bottom Layer w10: R2.2 3239,3059 3265,3085 v2(3335,3085) 3420,3000 3420,2780 3575,2625 3665,2625 U1.13
PWM3: *1.12 R2.3 U1.12 | length 787.8
  Top Layer w10: *1.12 v2@3324.57,3060.43
  Bottom Layer w10: R2.3 3304,3029 v2(3330,3055) 3395,2990 3395,2760 3585,2570 U1.12
PWM4: *1.11 R2.4 U1.11 | length 937.6
  Top Layer w10: *1.11 3315.16,3034.84 v2(3330,3020)
  Bottom Layer w10: R2.4 3305,2995 v2(3330,3020) 3370,2980 3370,2730 3580,2520 3660,2520 U1.11
PWM5: *1.15 R1.4 U1.15 | length 848.9
  Top Layer w10: *1.15 v2@3327.8,3137.2
  Bottom Layer w10: R1.4 3310,3155 3327.4,3137.6 v2(3327.4,3137) ; v2@3330,3135 3334,3139 3354.94,3139 3470,3023.94 3470,2840 3584.53,2725.47 3665.47,2725.47 U1.15
PWM6: *1.16 R1.3 U1.16 | length 718.2
  Top Layer w10: *1.16 v2@3332.8,3162.8
  Bottom Layer w10: R1.3 3311,3189 v2(3335,3165) 3357.23,3165 3495,3027.23 3495,2865 3590,2770 U1.16
PWM7: *1.17 R1.2 U1.17 | length 817.8
  Top Layer w10: *1.17 3323.39,3188.39 v2(3335,3200)
  Bottom Layer w10: R1.2 3316,3219 v2(3335,3200) 3350.51,3200 3520,3030.51 3520,2895 3590,2825 3665,2825 U1.17
PWM8: *1.18 R1.1 U1.18 | length 677.7
  Top Layer w10: *1.18 3313.98,3213.98 v2(3335,3235)
  Bottom Layer w10: R1.1 3317,3253 v2(3335,3235) 3345,3235 3545,3035 3545,2935 U1.18
RES: OLED1.5 U1.61 | length 869
  Bottom Layer w10: OLED1.5 2180,3225 2455,3225 U1.61
RO: J3.2 U1.41 | length 1684.5
  Top Layer w10: J3.2 2180,4060 v1(3235,4060)
  Bottom Layer w10: v1(3235,4060) 3320,4060 U1.41
"SW 1": R4.8 S1.1 U1.36 | length 649.8
  Top Layer w10: U1.36 3654.53,3814.53 3755.47,3814.53 S1.1
  Bottom Layer w10: S1.1 3990,3597 R4.8
"SW 2": R4.7 S1.2 U1.38 | length 773.5
  Top Layer w10: U1.38 3660,3920 3725,3920 3890,3755 3923.71,3755 4090,3588.71 S1.2
  Bottom Layer w10: S1.2 4121,3611 R4.7
"SW 3": R4.6 S1.3 U1.39 | length 773.6
  Top Layer w10: U1.39 3710,3966.82 3891.82,3785 3985,3785 S1.3
  Bottom Layer w10: R4.6 4151,3619 S1.3
"SW 4": R4.5 S1.4 U1.40 | length 1040.4
  Top Layer w10: U1.40 3660,4020 3735,4020 3940,3815 4055,3815 S1.4
  Bottom Layer w10: R4.5 4185,3685 S1.4
TF1_RX: TF1.2 U1.54 | length 905.5
  Top Layer w10: TF1.2 2604.61,4225.39 v1(2605,4225)
  Bottom Layer w10: U1.54 2460,3620 2594.06,3620 2654.53,3680.47 2654.53,4175.47 v1(2605,4225)
TF1_TX: TF1.3 U1.51 | length 623.8
  Top Layer w10: v1(2555,4225) 2555.39,4225.39 TF1.3
  Bottom Layer w10: U1.51 2555,3715 v1(2555,4225)
TF2_RX: TF2.2 U1.29 | length 1579.1
  Top Layer w10: U1.29 3730,3450 4339.61,3450 4849.61,3960 TF2.2
TF2_TX: TF2.3 U1.27 | length 2065.8
  Top Layer w10: U1.27 3660,3420 3595,3420 3554.53,3460.47 3554.53,3977.5 3647.03,4070 4735,4070 4800.39,4135.39 TF2.3
TF3_RX: TF3.2 U1.25 | length 2750.7
  Top Layer w10: TF3.2 2300.39,1845.39 2440,1985 2665,1985 2955,2275 v1@2955,3350
  Bottom Layer w10: v1(2955.39,3349.61) 2985.79,3380 3537.03,3380 3591.56,3325.47 3654.53,3325.47 U1.25
TF3_TX: TF3.3 U1.26 | length 2586.2
  Top Layer w10: TF3.3 2349.61,1854.61 2445,1950 2690,1950 3000,2260 v1@3000,3335
  Bottom Layer w10: v1(3000.39,3334.61) 3020.79,3355 3510,3355 3595,3270 U1.26
TF4_RX: TF4.2 U1.19 | length 1727.7
  Top Layer w10: U1.19 3790,2890 3790,2585 4370,2005 4682.67,2005 4795.39,1892.28 TF4.2
TF4_TX: TF4.3 U1.20 | length 1906.8
  Top Layer w10: U1.20 3654.53,3014.53 3728.44,3014.53 3830,2912.97 3830,2620 4415,2035 4701.88,2035 4844.61,1892.28 TF4.3
pads on no net: *2.7 *2.8 J1.0 J2.0 J4.0 J5.0 S2.1 S3.1 TF1.0 TF2.0 TF3.0 TF4.0 U1.3 U1.4 U1.7 U1.8 U1.9 U1.10 U1.21 U1.22 U1.28 U1.30 U1.43 U1.44 U1.45 U1.46 U1.47 U1.48 U1.49 U1.50 U1.52 U1.53 U1.65 U1.67 U1.68 U1.69 U1.70 U1.71 U1.72 U1.73 U1.74 U1.75 U1.76 U1.78 U1.81 U1.83 U1.84

## Polygon pours and split planes (outlines as drawn)
AGND on Top Layer "AGND-T1" (solid, remove dead copper, pour order 4): 3645,4655 3645,4275 3650,4270 3935,3985 4005,3985 4345,3985 4425,3905 4405,3885 4405,3550 4210,3550 4005,3345 4030,3320 4030,3145 3910,3145 3815,3050 3815,1930 3550,1930 3345,2135 3265,2135 3265,1710 3615,1360 3620,1355 6280,1355 6280,4575 6190,4665
DGND on Top Layer "DGND-T1" (solid, remove dead copper, pour order 10): 6475,3995 5795,4675 5795,4730 1790,4730 1405,4345 1430,4320 1430,1550 1430,1545 2035,940 2155,1060 6570,1060 6570,1655 6430,1795 6210,2015 4500,2015 4500,4010 4270,4240 4540,3970 6410,3970
AGND on Bottom Layer "AGND-B1" (solid, remove dead copper, pour order 6): 3635,4670 3635,4260 3640,4255 3940,3955 3940,3950 4355,3950 4360,3945 4375,3930 4375,3770 4375,3560 4365,3550 4315,3500 4075,3500 4075,3445 3800,3170 3755,3125 3755,1995 3520,1995 3355,2160 3325,2130 3250,2130 3250,1710 3265,1695 3655,1305 3655,1300 6310,1300 6350,1340 6315,1375 6315,4675
DGND on Bottom Layer "DGND-B1" (solid, remove dead copper, pour order 8): 6370,4065 6310,4005 4535,4005 4535,3975 4355,3795 4430,3720 4430,3465 4430,1970 4320,1860 4430,1970 6080,1970 6135,1970 6435,1670 6430,1665 6430,1160 2005,1160 1530,1635 1535,1640 1535,4545 5910,4545 6390,4065

## Keep-outs
Keep-Out Layer:
  lines w10: 1895,4563 2220,4563 3033.75,4563 4661.25,4563 5475,4563 ; 1905,4563 1845,4563 ccw(c1842.5,4370.5) 1650,4373 1650,4333 1650,4273 1650,4073 1650,1953 1650,1813 1650,1723 1650,1673 ccw(c1820,1688) 1835,1518 2225,1518 ; 2215,1518 5470,1518 ; 5465,1518 5850,1518 ; 5470,4563 5800,4563 5860,4563 cw(c5855,4378) 6040,4373 6040,4098 ; 5855,1518 ccw(c5850,1708) 6040,1713 6040,1978 6040,4103

## Other copper
Top Layer:
  rectangle net 3V3: 4155,3320 4335,3430
  rectangle net 5V: 4430,3320 4615,3430
  rectangle net 7V2-MCU: 4160,2615 4270,2785
  rectangle net 7V2-MCU: 3945,2575 4275,2725
  rectangle net 5V-MCU: 4290,2375 4395,2780
  rectangle net 7V2-LATER: 5220,3100 5340,3275
  rectangle net 7V2-LATER: 5220,3245 5580,3390
  rectangle net 7V2-MCU: 4600,2055 4875,2220
  rectangle net 7V2-LATER: 5220,3640 5335,3795
  rectangle net 7V2-LATER: 5220,3765 5585,3920
  rectangle net 5V: 5105,3630 5195,4045
  rectangle net 5V: 5125,3105 5180,3195
  rectangle net 5V: 5100,3150 5190,3495
  rectangle net 5V: 4615,3320 4855,3430
  rectangle net 5V: 5095,4040 5210,4080
  text "南昌大学" at 1939.37,4275.25 h60
  text "2020" at 2200,4270 h60
  text "红黑红黑的小黄鸡二队" at 1934.37,4220.25 h42
Bottom Layer:
  rectangle net 5V-MCU: 4290,2675 4535,2790
  rectangle net 5V-MCU: 4290,2550 4725,2710
  rectangle net 5V: 4750,3225 5190,3395
  rectangle net FUSE: 4975,2760 5070,2885
  rectangle net 5V: 4735,3765 5195,3920
  rectangle net 5V: 4975,3695 5195,3770
  rectangle net 5V: 4975,3150 5095,3230
  rectangle net FUSE: 4845,2460 4965,2890

## Silkscreen, mask and mechanical layers (free items; w line width, h text height)
Top Solder:
  text "南昌大学" at 1939.37,4275.25 h60
  text "2020" at 2200,4270 h60
  text "红黑红黑的小黄鸡二队" at 1934.37,4220.25 h42

## Text inside footprints (layer, text, board x,y; h text height)
Bluetooth1: Top Overlay "vcc" at 2095,2017 h60 r90
C8: Bottom Overlay "+" at 5137,3266.94 h40 r90
C12: Bottom Overlay "+" at 5287,3266.94 h40 r90
C18: Bottom Overlay "+" at 5135,3805.93 h40 r90
C22: Bottom Overlay "+" at 5287,3805.93 h40 r90
C24: Bottom Overlay "+" at 4287,3445.93 h40 r90
C28: Bottom Overlay "+" at 4358,2664.07 h30 r270
C32: Bottom Overlay "+" at 4208,2664.07 h30 r270
J12: Top Overlay "+" at 4238,4193.35 h40
J13: Top Overlay "+" at 3377,1887.65 h40 r180
OLED1: Top Overlay "GND" at 1663,3324 h60 r270
U1: Top Overlay "CoreBoard Vx.x" at 2560,2995 h40 r270; Top Overlay "IMX-RT1064 xVL" at 2635,2995 h40 r270